# Altium PCB Печатная плата.PcbDoc
Units mm, origin at the board's own origin, x right, y up, seen from the top; angles counter-clockwise.
Board outline 140 x 100 mm, 2 copper layers (Top Layer, Bottom Layer), stack 1.571 mm thick; 55 components, 41 nets, 204 pads, 18 vias.
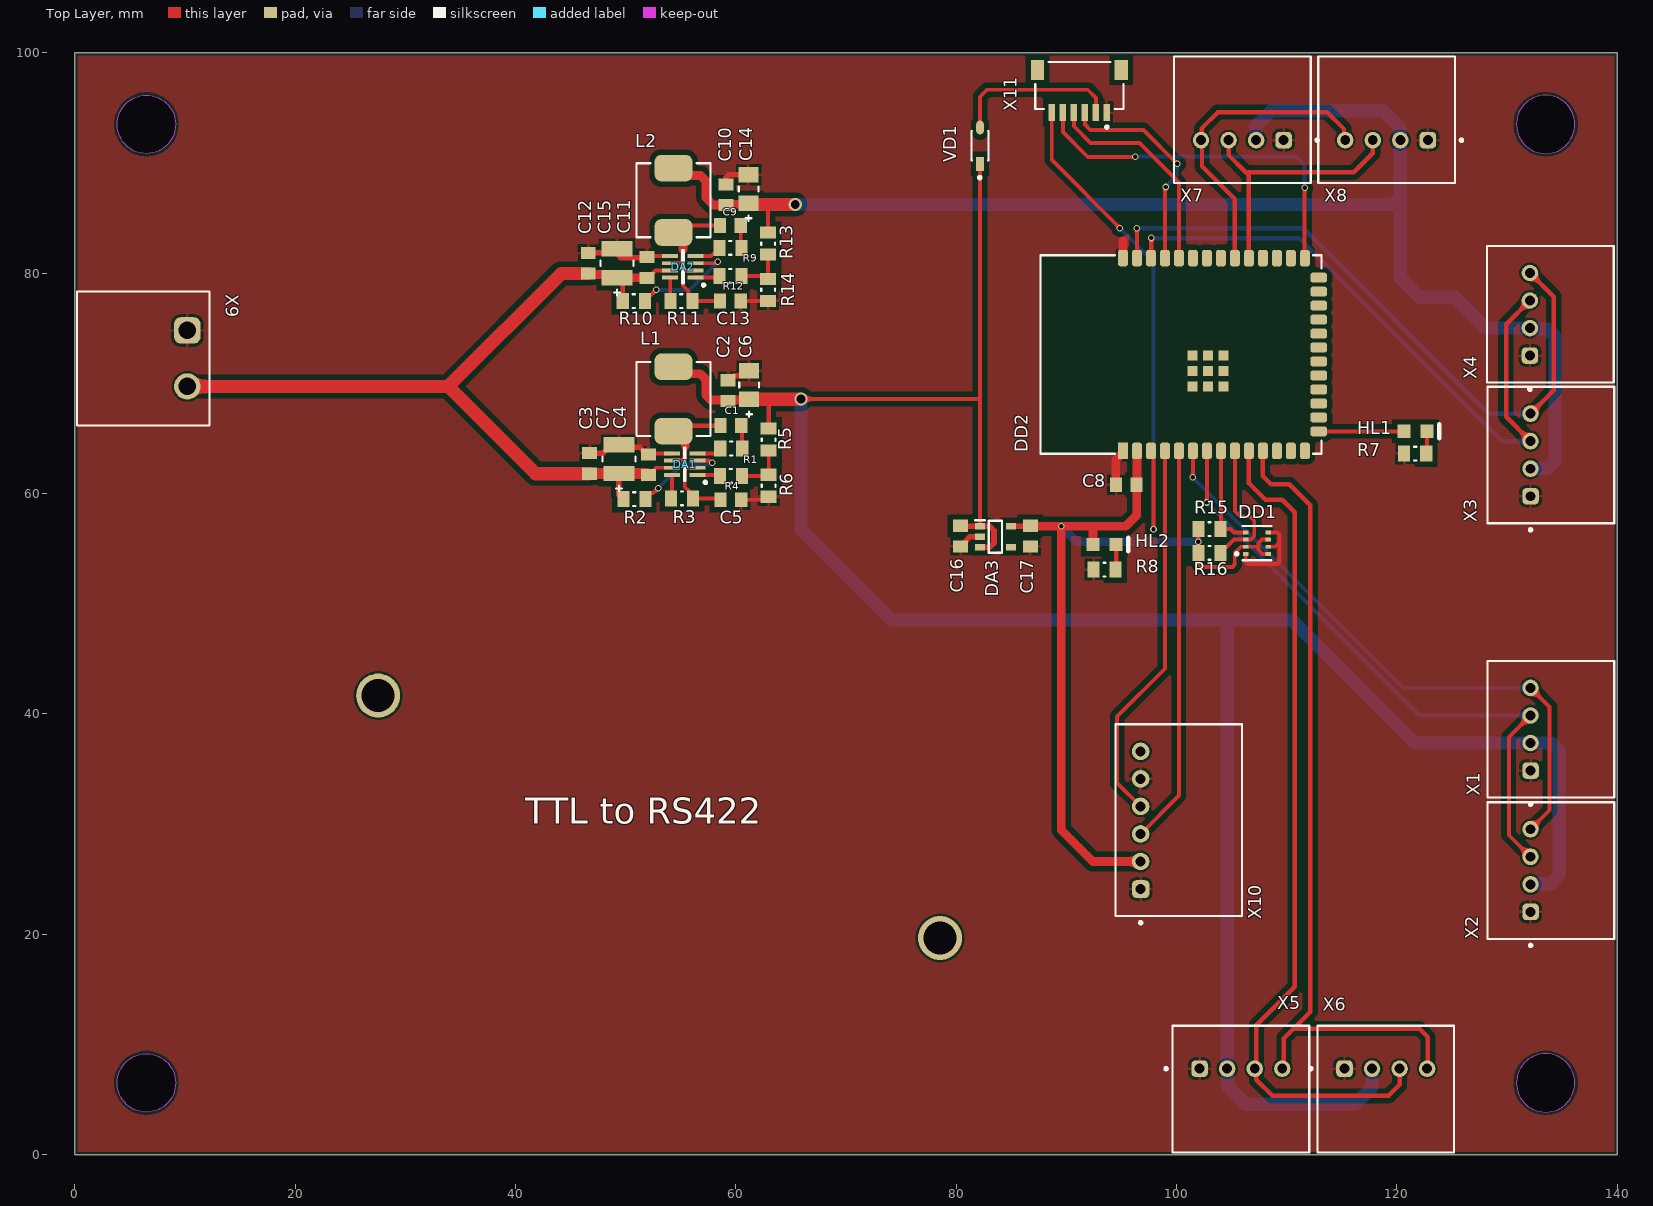
[diagram p0: Top Layer view]
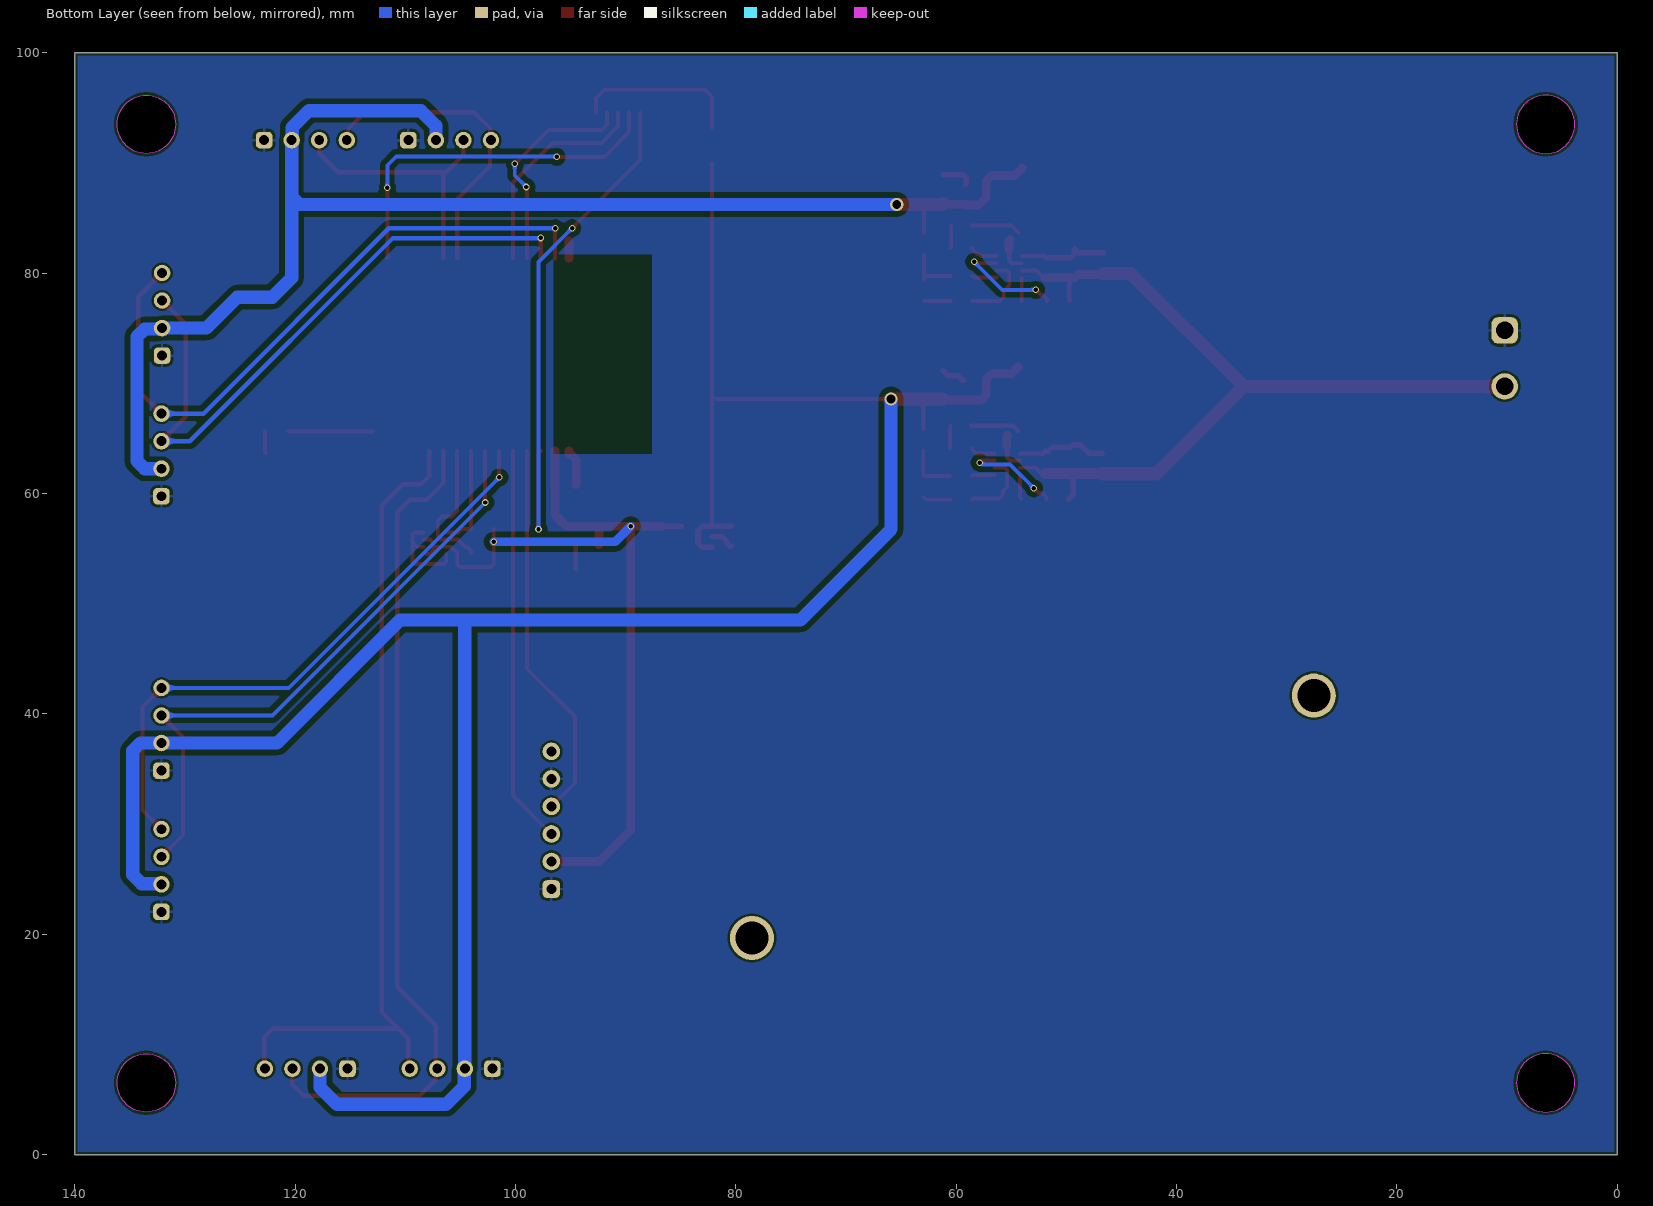
[diagram p1: Bottom Layer view, seen from below]
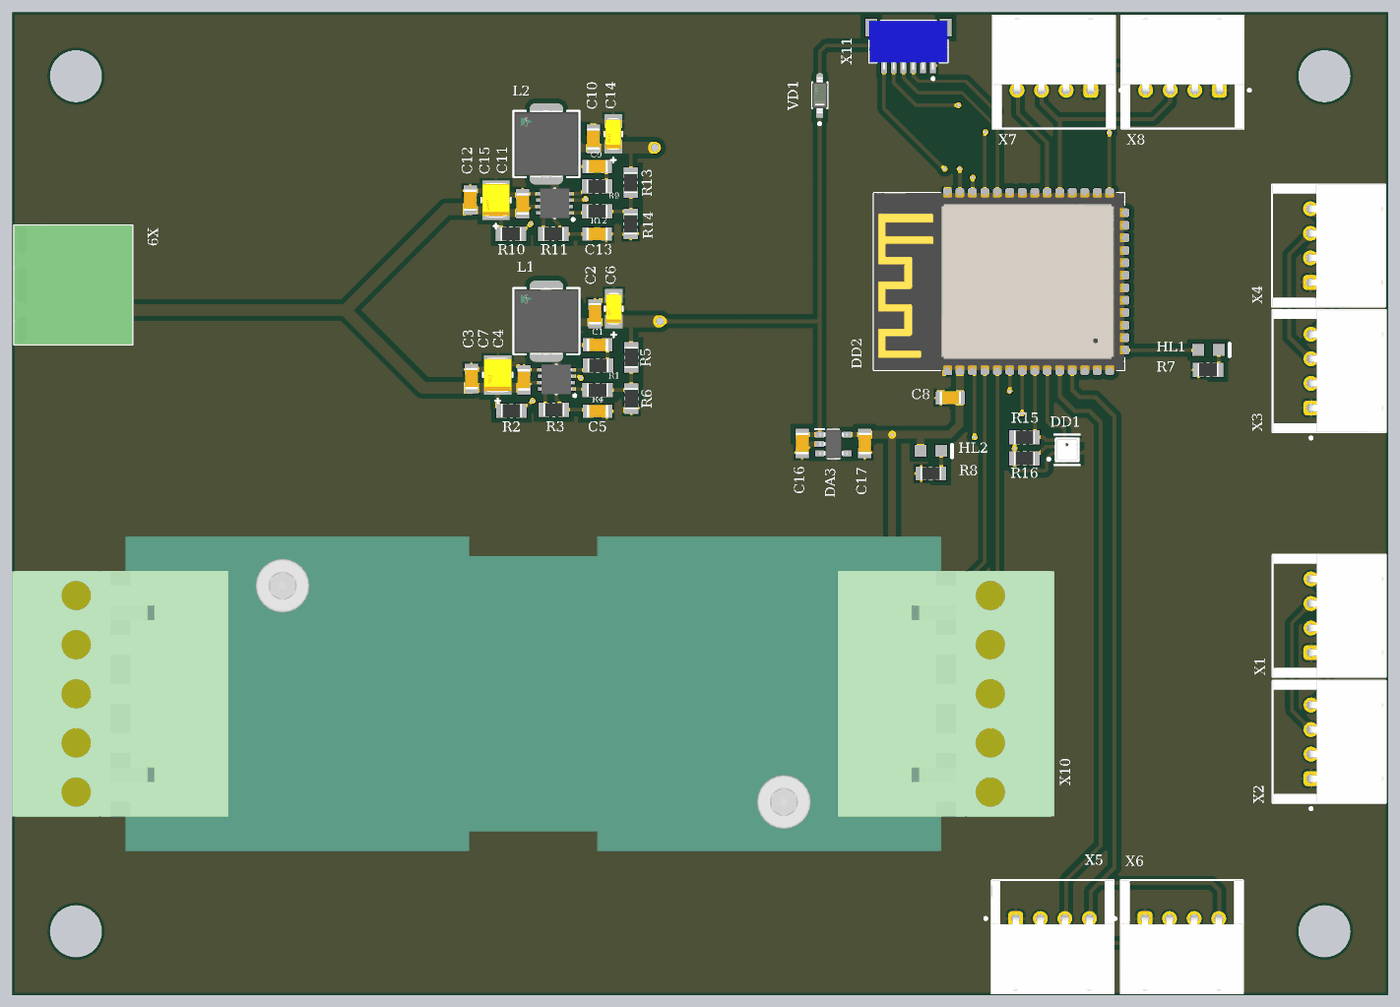
[diagram p2: 3D render of the assembled board from above, using the file's embedded part models]

## Layer stack, top to bottom
Top Solder: solder mask 0.0102, SunChemicalXV501-T LDI, Dk 3.5
Top Layer: signal copper 0.0356
Dielectric 1: dielectric 1.5, FR-4, Dk 4.8
Bottom Layer: signal copper 0.0356
Bottom Solder: solder mask 0.0102, SunChemicalXV501-T LDI, Dk 3.5

## Board outline
0.006,0.006 0.006,100.006 140.006,100.006 140.006,0.006
cut-out: 130.856,93.506 ccw(c133.506,93.506) 133.506,90.856 ccw(c133.506,93.506) 136.156,93.506 ccw(c133.506,93.506) 133.506,96.156 ccw(c133.506,93.506)
cut-out: 130.856,6.506 ccw(c133.506,6.506) 133.506,3.856 ccw(c133.506,6.506) 136.156,6.506 ccw(c133.506,6.506) 133.506,9.156 ccw(c133.506,6.506)
cut-out: 6.506,90.856 cw(c6.506,93.506) 3.856,93.506 cw(c6.506,93.506) 6.506,96.156 cw(c6.506,93.506) 9.156,93.506 cw(c6.506,93.506)
cut-out: 6.506,3.856 cw(c6.506,6.506) 3.856,6.506 cw(c6.506,6.506) 6.506,9.156 cw(c6.506,6.506) 9.156,6.506 cw(c6.506,6.506)

## Design rules (kind name [scope] priority, off if disabled: settings)
BoardOutlineClearance [All] p1: gap=0.25 ignorepadtopadclearanceinfootprint=FALSE
Clearance [All] p1: gap=0.2 ignorepadtopadclearanceinfootprint=FALSE except(0.5: Arc-Fill Arc-Poly Arc-Region Track-Fill Track-Poly Track-Region SMDPad-Fill SMDPad-Poly SMDPad-Region Via-Fill Via-Poly Via-Region)
ComponentClearance [All] p1: gap=0 collisioncheckmode=3 verticalgap=0 showdistances=FALSE
HoleSize [All] p1: absolutevalues=TRUE maxlimit=3 minlimit=0.025 maxpercent=80.000 minpercent=20.000
MinimumSolderMaskSliver [All] p1: minsoldermaskwidth=0.2
PolygonConnect [All] p1: connectstyle=Relief reliefconductorwidth=0.254 reliefentries=4 polygonreliefangle="90 Angle" airgapwidth=0.254
RoutingVias [All] p1: holewidth=0.8 width=1.2 viastyle="Through Hole" minholewidth=0.3 minwidth=0.5 maxholewidth=0.4 maxwidth=0.6
SilkToSilkClearance [All] p1: silktosilkclearance=0.2
SolderMaskExpansion [All] p1: expansion=0.102 istentingtop=FALSE
SupplyNets "Schematic Supply Nets_4" [InNet('+3.3')] p1: voltage=0.000
SupplyNets "Schematic Supply Nets_3" [InNet('GND')] p2: voltage=0.000
SupplyNets "Schematic Supply Nets_2" [InNet('VIN')] p3: voltage=0.000
SupplyNets "Schematic Supply Nets_1" [InNet('+5 гр1')] p4: voltage=0.000
SupplyNets "Schematic Supply Nets" [InNet('+5 гр2')] p5: voltage=0.000
Width [All] p1: maxlimit=1.2 minlimit=0.2 preferedwidth=0.4
26 further rules are at their usual default settings.

## Components (designator, comment, footprint, x,y, rotation, side; value= is the part's Value field where it differs from the comment)
C1 "100nF" CAPC2012X10N 59.563,66.167 r0 top
C2 "100nF" CAPC2012X10N 59.309,69.342 r90 top
C3 "100nF" CAPC2012X10N 46.736,62.738 r90 top
C4 "100nF" CAPC2012X10N 52.07,62.611 r90 top
C5 "100nF" CAPC2012X10N 59.563,59.436 r0 top
C6 "47uF" FP-TAJA-MFG 61.214,69.85 r270 top
C7 "10uF" FP-TAJB-MFG 49.403,63.119 r270 top
C8 "100nF" CAPC2012X10N 95.449,60.795 r180 top
C9 "100nF" CAPC2012X10N 59.512,84.328 r0 top
C10 "100nF" CAPC2012X10N 59.131,87.122 r90 top
C11 "100nF" CAPC2012X10N 51.943,80.518 r90 top
C12 "100nF" CAPC2012X10N 46.609,80.899 r90 top
C13 "100nF" CAPC2012X10N 59.512,77.47 r0 top
C14 "47uF" FP-TAJA-MFG 61.163,87.63 r270 top
C15 "10uF" FP-TAJB-MFG 49.225,80.899 r270 top
C16 "10uF" CAPC2012X10N 80.391,56.134 r270 top
C17 "10uF" CAPC2012X10N 86.741,56.134 r270 top
DA1 "MP9943GQ-Z" "MP9943 QFN8" 57.115,61.017 r180 top
DA2 "MP9943GQ-Z" "MP9943 QFN8" 56.951,78.924 r180 top
DA3 "LM8805SF5-3.3" SOT95P280X130-5N 83.566,56.083 r0 top
DD1 "BME280" FP-BME280-MFG 107.315,55.499 r180 top
DD2 "ESP32-S3-WROOM-1" ESP32-S3-WROOM-1 100.407,72.617 r90 top
HL1 "FYLS-0805URC" "LED 0805" 121.7,65.659 r0 top
HL2 "FYLS-0805URC" "LED 0805" 93.472,55.372 r0 top
L1 "10uH" FP-IHLP-2525CZ-FP_2_413x3-MFG 54.356,68.58 r90 top
L2 "10uH" FP-IHLP-2525CZ-FP_2_413x3-MFG 54.356,86.614 r90 top
R1 "20" RES0805 59.595,64.084 r0 top
R2 "510k" RES0805 50.8,59.484 r0 top
R3 "100k" RES0805 55.118,59.563 r180 top
R4 "51k" RES0805 59.563,61.595 r0 top
R5 "41.2k" RES0805 62.992,64.897 r90 top
R6 "7.5k" RES0805 62.992,60.706 r90 top
R7 "56" RES0805 121.666,63.627 r0 top
R8 "56" RES0805 93.472,53.086 r0 top
R9 "20" RES0805 59.512,82.296 r0 top
R10 "510k" RES0805 50.749,77.47 r0 top
R11 "100k" RES0805 55.067,77.47 r180 top
R12 "51k" RES0805 59.512,79.756 r0 top
R13 "41.2k" RES0805 62.941,82.677 r90 top
R14 "7.5k" RES0805 62.941,78.486 r90 top
R15 "4.7k" RES0805 102.997,56.769 r180 top
R16 "4.7k" RES0805 102.997,54.61 r180 top
"TTL to RS422" "Comment" WaveShareTTLto422 27.545,19.66 r0 top
VD1 "B0520W" FP-SOD123-IPC_B 82.169,91.567 r90 top
X1 "S4B-XH-A(LF)(SN)" FP-S4B-XH-A-1_LF_SN-MFG 133.985,38.608 r270 top
X2 "S4B-XH-A(LF)(SN)" FP-S4B-XH-A-1_LF_SN-MFG 133.985,25.781 r270 top
X3 "S4B-XH-A(LF)(SN)" FP-S4B-XH-A-1_LF_SN-MFG 133.985,63.5 r270 top
X4 "S4B-XH-A(LF)(SN)" FP-S4B-XH-A-1_LF_SN-MFG 133.93,76.267 r270 top
X5 "S4B-XH-A(LF)(SN)" FP-S4B-XH-A-1_LF_SN-MFG 105.851,5.95 r180 top
X6 "S4B-XH-A(LF)(SN)" FP-S4B-XH-A-1_LF_SN-MFG 119,5.95 r180 top
X7 "S4B-XH-A(LF)(SN)" FP-S4B-XH-A-1_LF_SN-MFG 105.978,93.925 r0 top
X8 "S4B-XH-A(LF)(SN)" FP-S4B-XH-A-1_LF_SN-MFG 119.066,93.925 r0 top
X9 "2EDGRC-5.08-02P-14" 691313510002 6.225,72.263 r270 top
X10 "S6B-XH-A" FP-S6B-XH-A_LF_SN-MFG 100.203,30.353 r270 top
X11 "SM06B-SRSS-TB" JST-SM06B-SRSS-TB_V 91.186,97.028 r180 top

## Footprints (in the part's own frame and the unit in brackets; to place one, negate y for a bottom-side part, rotate by r counter-clockwise, add the part's x,y. Pads: shape width x height; smd on the part's side, far side on the other; paste and mask are expansions set on the pad)
691313510002 [mm] "5,08mm - PCB Headers - Horizontal - Closed ends - 02p"
  rrect50% 2.4x2.4 hole 1.6: 1(-2.54,4)
  round 2.4 hole 1.6: 2(2.54,4)
  silkscreen extent -6.08,-6 6.08,6, body extent -6.08,-6 6.08,6, height 8.55
CAPC2012X10N [mm] "Chip Capacitor, 2-Leads, Body 2,05x1,20mm, IPC Medium Density"
  rect 1.1x1.35 smd: 1(-0.94,0) 2(0.94,0)
  body extent -1.1,-0.65 1.1,0.65, height 1
ESP32-S3-WROOM-1 [mm] "PCB ANTENNA - 41 PIN"
  rect 1.5x0.9 smd: 1(-8.75,5.26)
  rrect50% 1.5x0.9 smd: 2(-8.75,3.99) 3(-8.75,2.72) 4(-8.75,1.45) 5(-8.75,0.18) 6(-8.75,-1.09) 7(-8.75,-2.36) 8(-8.75,-3.63) 9(-8.75,-4.9) 10(-8.75,-6.17) 11(-8.75,-7.44) 12(-8.75,-8.71) 13(-8.75,-9.98) 14(-8.75,-11.25) 27(8.75,-11.25) 28(8.75,-9.98) 29(8.75,-8.71) 30(8.75,-7.44) 31(8.75,-6.17) 32(8.75,-4.9) 33(8.75,-3.63) 34(8.75,-2.36) 35(8.75,-1.09) 36(8.75,0.18) 37(8.75,1.45) 38(8.75,2.72) 39(8.75,3.99) 40(8.75,5.26)
  rrect50% 0.9x1.5 smd: 15(-6.985,-12.5) 16(-5.715,-12.5) 17(-4.445,-12.5) 18(-3.175,-12.5) 19(-1.905,-12.5) 20(-0.635,-12.5) 21(0.635,-12.5) 22(1.905,-12.5) 23(3.175,-12.5) 24(4.445,-12.5) 25(5.715,-12.5) 26(6.985,-12.5)
  rect 0.9x0.9 smd: 41(-2.9,-2.46) 41(-2.9,-1.06) 41(-2.9,-3.86) 41(-1.5,-1.06) 41(-1.5,-3.86) 41(-1.5,-2.46) 41(-0.1,-1.06) 41(-0.1,-2.46) 41(-0.1,-3.86)
  silkscreen extent -9,-12.75 9,12.75, body extent -9,-12.75 9,12.75, height 3.1
FP-BME280-MFG [mm]
  rect 0.5x0.35 smd paste+0 mask+0: 1(1.025,0.975) 2(1.025,0.325) 3(1.025,-0.325) 4(1.025,-0.975) 5(-1.025,-0.975) 6(-1.025,-0.325) 7(-1.025,0.325) 8(-1.025,0.975)
  silkscreen extent -1.3,-1.55 1.97,1.55, body extent -1.25,-1.25 1.25,1.25, height 0.97
FP-IHLP-2525CZ-FP_2_413x3-MFG [mil]
  rrect50% 95x135 smd paste+0 mask+0: 1(-115,0) 2(115,0)
  silkscreen extent -132,-132 132,132, body extent -166,-136 166,136, height 10
FP-S4B-XH-A-1_LF_SN-MFG [mm]
  rrect50% 1.5x1.5 hole 0.9 paste-2539.97 mask+0: 1(3.75,-1.85)
  round 1.5 hole 0.9 paste-2539.97 mask+0: 2(1.25,-1.85) 3(-1.25,-1.85) 4(-3.75,-1.85)
  silkscreen extent -6.2,-5.75 6.92,5.75, body extent -6.3,-5.85 6.3,5.85, height 0.25
FP-S6B-XH-A_LF_SN-MFG [mm]
  rrect50% 1.6x1.6 hole 0.9 paste-2539.97 mask+0: 1(6.25,-3.45)
  round 1.6 hole 0.9 paste-2539.97 mask+0: 2(3.75,-3.45) 3(1.25,-3.45) 4(-1.25,-3.45) 5(-3.75,-3.45) 6(-6.25,-3.45)
  silkscreen extent -8.7,-5.75 9.42,5.75, body extent -8.8,-5.85 8.8,5.85, height 0.25
FP-SOD123-IPC_B [mm]
  rect 1.257x0.702 smd paste+0 mask+0: 1(-1.65,0)
  rrect100% 1.257x0.702 smd paste+0 mask+0: 2(1.65,0)
  silkscreen extent -3.02,-0.77 1.33,0.77, body extent -2.53,-1.02 2.53,1.02, height 0.25
FP-TAJA-MFG [mm]
  rect 1.4x1.8 smd paste+0 mask+0: 1(-1.3,0) 2(1.3,0)
  silkscreen extent -0.23,-0.9 2.9,0.9, body extent -2.1,-1 2.1,1, height 0.25
FP-TAJB-MFG [mm]
  rect 1.4x2.8 smd paste+0 mask+0: 1(-1.3,0) 2(1.3,0)
  silkscreen extent -0.23,-1.5 2.9,1.5, body extent -2.1,-1.6 2.1,1.6, height 0.25
JST-SM06B-SRSS-TB_V [mm] "SMD, 6-Leads, Body 8x4.25mm, Pitch 1mm"
  rect 0.6x1.55 smd: 1(-2.5,2.45) 2(-1.5,2.45) 3(-0.5,2.45) 4(0.5,2.45) 5(1.5,2.45) 6(2.5,2.45)
  rect 1.2x1.8 smd: MP1(-3.8,-1.425) MP2(3.8,-1.425)
  silkscreen extent -4,-2.12 4,3.9, body extent -4,-2.12 4,2.83, height 2.96
"LED 0805" [mm] "SMD, 2-Leads, Body 2x1.25mm, Height 0.8mm"
  rect 1.2x1.2 smd: 1(-1.05,0) 2(1.05,0)
  silkscreen extent 2.15,-0.63 2.15,0.63, body extent -1,-0.63 1,0.63, height 0.8
"MP9943 QFN8" [mm]
  rect 1.45x0.35 smd: 1(0.6,-0.675) 2(0.6,-1.325) 3(0.6,-1.975) 4(0.6,-2.625) 5(2.9,-2.625) 6(2.9,-1.975) 7(2.9,-1.325) 8(2.9,-0.675)
  silkscreen extent -0.25,-3.15 1.83,0.12, body extent 0.2,-3.15 3.3,-0.15, height 1
RES0805 [mm] "Chip Resistor, 2-Leads, Body 2.1x1.35mm, IPC Low Density"
  rect 1.1x1.45 smd: 1(-1,0) 2(1,0)
  silkscreen extent -0.1,-0.63 0.1,0.63, body extent -1.05,-0.68 1.05,0.67, height 0.6
SOT95P280X130-5N [mm]
  rect 0.9x0.6 smd: 1(-1.4,0.95) 2(-1.4,0) 3(-1.4,-0.95) 4(1.4,-0.95) 5(1.4,0.95)
  silkscreen extent -1.85,-1.45 0.6,1.5, body extent -1.4,-1.45 1.4,1.45, height 1.3
WaveShareTTLto422 [mm]
  round 4 hole 3 paste-2539.97 mask+0: MH9(0,22) MH9(51,0)
  body extent -27.53,-4.99 78.47,27.01, height 22.5

## Part data
C1 C2 C3 C4 C5 C8 C9 C11 C12 C13: library part "Конденсатор керамика"
  C1 C2 C3 C4 C5: ClassName=DCDC1
  C9 C11 C12 C13: ClassName=DCDC2
C6 C7 C14 C15: library part "Конденсатор танталовый", "Capacitor Polarised", Arrow Part Number=293D475X9010A2TE3, Manufacturer_Name=Vishay, Mouser Part Number=74-293D475X9010A2TE3, Arrow Price/Stock=https://www.arrow.com/en/products/293d475x9010a2te3/vishay, Datasheet Link=http://www.vishay.com/docs/40002/293d.pdf, Height=1.8mm, Manufacturer_Part_Number=293D475X9010A2TE3, Mouser Price/Stock=https://www.mouser.co.uk/ProductDetail/Vishay-Sprague/293D475X9010A2TE3?qs=zj6zwI%252Bv92RDYyeabgx%252B6w%3D%3D
  C6 C7: ClassName=DCDC1
  C14 C15: ClassName=DCDC2
C10: library part "Конденсатор керамика", Manufacturer=Murata, ClassName=DCDC2
C16 C17: library part "Capasitor SMD", ClassName=Power
DA1 DA2: "High Efficiency 3A Peak, 36V, / Synchronous Step Down Converter / With Power Good"
  DA1: ClassName=DCDC1
  DA2: ClassName=DCDC2
DA3: library part XC6219B332MRN, "Voltage stabilizer 3.3v 350mA", Manufacturer_Name=Torex, ClassName=Power, Datasheet Link=https://componentsearchengine.com/Datasheets/2/XC6219B332MRN.pdf, Height=1.3mm, Manufacturer_Part_Number=XC6219B332MRN
DD1: "SENSOR PRESSURE HUMIDITY TEMP", Case/Package=LGA, Max Operating Temperature=85°C, Min Operating Temperature=-40°C, Accuracy=3%, Lead Free="Lead Free", Mount="Surface Mount", Number of Pins=8, Output Type=SPI, Packaging="Cut Tape", Response Time=1s, Sensor Type=Temperature
DD2: "RX TXRX MOD WIFI SURFACE MOUNT", Case/Package=SMD/SMT, Frequency=2.5GHz, Max Operating Temperature=85°C, Min Operating Temperature=-40°C, Operating Supply Voltage=3.6V, Package Quantity=550, Data Rate=150Mbps, Mount="Surface Mount", Packaging="Cut Tape", Sensitivity=-98dBm, Weight=0.088185oz
HL1: library part Светодиод, Manufacturer="Ningbo Foryard Optoelectronics", ClassName=Indacation
HL2: library part Светодиод
L1 L2: library part Дроссель, Ambient Temperature Range High=95°C, Ambient Temperature Range Low=-40°C, Case Code (Imperial)=1919, Case Code (Metric)=4848, Current Rating=420mA, DC Resistance (DCR)=770mΩ, Inductance=150µH, Inductance Tolerance=30%, Max Operating Temperature=125°C, Saturation Current=220mA, Self Resonant Frequency=7MHz, Test Frequency=100kHz, Case/Package=1919, Composition=Wirewound, Core Material=Ferrite, Height=2.8mm, Height - Seated (Max)=2.9972mm, Length=4.8mm, Max DC Current=420mA, Min Operating Temperature=-40°C, Mount="Surface Mount", NexarPartId=22866852, Number of Pins=2, Packaging="Tape & Reel (TR)", REACH SVHC=Unknown, RMS Current (Irms)=420mA, RoHS=Compliant, Shielding=Shielded, Termination=SMD/SMT, Tolerance=30%, Width=4.8mm
  L1: ClassName=DCDC1
  L2: ClassName=DCDC2
R1 R2 R3 R4 R5 R6 R7 R8 R9 R10 R11 R12 R13 R14 R15 R16: library part "Резистор SMD", "SMD resistors with differents footprints"
  R1 R2 R3 R4 R5 R6: ClassName=DCDC1
  R7: ClassName=Indacation
  R9 R10 R11 R12 R13 R14: ClassName=DCDC2
VD1: library part "Диод Шоттки"
X1 X2 X3 X4 X5 X6 X7 X8: library part JST-4P, "JST type connector", Net1=GND, Net2=+5V, Net3=A, Net4=B
X9: library part "Screw terminal 2p", "XT30-PWM", Net1=GND, Net2=+5V
X10 X11: library part JST-6P, "JST type connector", Net1=GND, Net2=+5V
  X10: Net3=RX, Net4=TX, Net5="GND TTL", Net6=NC
  X11: Net3=TX, Net4=RX, Net5=BOOT, Net6=ENABLE

## Via types
v1: diameter 0.6, hole 0.4, Top Layer to Bottom Layer, 16 vias
v2: diameter 1.2, hole 0.8, Top Layer to Bottom Layer, 2 vias

## Nets (pads, with @x,y where several pads share a name; then routed paths per layer and width w, separated by ;. In a path a pad name is that pad's centre, name@x,y a point inside that pad or via, vN(x,y) a via of type N, cw(c..) or ccw(c..) an arc to the next point about the centre after c; other vN are vias at no path point)
+3.3: C8.1 C17.1 DA3.5 DD1.2 DD1.6 DD1.8 DD2.2 HL2.1 R15.2 R16.2 X10.2 | length 81
  Top Layer w0.35: R15.2 101.981,56.753 v1(101.981,55.626) 101.981,53.594 102.235,53.34 105.078,53.34 105.283,53.545 105.283,54.61 105.847,55.174 DD1.2 107.434,55.174 107.442,55.181 ; 108.077,54.508 108.061,54.524 107.782,54.524 107.442,54.864 107.442,55.181 ; DD1.6 107.767,55.824 107.442,55.499 107.442,55.181
  Top Layer w0.5: DA3.5 86.7,57.033 C17.1
  Top Layer w0.8: C17.1@86.741,57.033 v1(89.535,57.033) ; HL2.1 92.422,56.94 92.329,57.033 ; DD2.2 96.417,60.824 C8.1 96.389,58.035 95.387,57.033 92.329,57.033 ; X10.2 92.396,26.603 89.535,29.464 v1(89.535,57.033) ; v1(89.535,57.033) 92.329,57.033
  Bottom Layer w0.8: v1(89.535,57.033) 90.942,55.626 v1(101.981,55.626)
"+5 гр1": C2.1 C6.2 C16.1 DA3.1 DA3.3 L1.2 R5.2 VD1.1 X1.2 X2.2 X5.2 X6.2 | length 232.9
  Top Layer w0.4: R5.2 62.992,68.438 63.104,68.55 ; v2(65.913,68.58) 82.166,68.58 ; DA3.1 82.166,68.58 ; VD1.1 82.169,84.68 82.166,84.677 82.166,68.58
  Top Layer w0.5: C16.1 80.442,57.023 83.058,57.023 83.439,56.642 83.439,55.499 83.073,55.133 DA3.3
  Top Layer w0.8: L1.2 54.991,70.866 56.769,70.866 57.277,70.358 57.277,68.945 57.746,68.476 61.14,68.476 C6.2
  Top Layer w1.2: C6.2 63.104,68.55 65.883,68.55 v2(65.913,68.58)
  Bottom Layer w1.2: v2(65.913,68.58) 65.913,56.769 74.168,48.514 104.601,48.514 ; X6.2 117.75,6.117 116.205,4.572 106.299,4.572 104.658,6.213 104.658,7.69 104.601,7.747 104.601,48.514 ; X2.2 132.192,24.588 133.935,24.588 134.747,25.4 134.747,36.655 134.044,37.358 X1.2 121.646,37.358 110.49,48.514 104.601,48.514
"+5 гр2": C10.1 C14.2 L2.2 R13.2 X3.2 X4.2 X7.2 X8.2 | length 130.5
  Top Layer w0.35: 62.865,86.233 62.941,86.157 R13.2
  Top Layer w0.8: L2.2@54.023,89.535 54.704,88.854 56.808,88.854 57.277,88.385 57.277,86.868 57.963,86.182 C10.1 59.205,86.256 61.089,86.256 C14.2
  Top Layer w1.2: C14.2 61.26,86.233 62.865,86.233 v2(65.405,86.233)
  Bottom Layer w1.2: v2(65.405,86.233) 119.613,86.233 120.316,86.936 ; X7.2 107.228,93.385 108.585,94.742 118.745,94.742 120.261,93.226 120.261,92.13 X8.2 120.316,86.936 ; X4.2 128.056,75.017 125.252,77.821 122.077,77.821 120.316,79.582 120.316,86.936 ; X3.2 133.663,62.25 134.366,62.953 134.366,74.227 133.663,74.93 X4.2@132.379,74.93
"A1 гр1": DD2.7 X1.3 X2.3 | length 56.5
  Top Layer w0.35: v1(102.743,59.182) 102.767,59.206 DD2.7 ; X2.3 130.175,28.991 130.175,37.898 X1.3
  Bottom Layer w0.35: v1(102.743,59.182) 122.067,39.858 X1.3
"A1 гр2": DD2.38 X3.3 X4.3 | length 58.5
  Top Layer w0.4: DD2.38 97.727,81.407 v1(97.727,83.196) ; X4.3 129.921,75.358 129.921,66.964 X3.3
  Bottom Layer w0.4: v1(97.727,83.196) 97.738,83.185 111.125,83.185 129.56,64.75 X3.3
"A2 гр1": DD2.10 X5.3 X6.3 | length 76.7
  Top Layer w0.4: DD2.10 106.577,60.936 108.077,59.436 109.601,59.436 110.744,58.293 110.744,15.24 107.25,11.746 107.25,7.946 107.25,7.896 107.101,7.747 107.25,7.598 107.25,6.796 108.712,5.334 119.253,5.334 120.25,6.331 X6.3
"A2 гр2": DD2.31 X7.3 X8.3 | length 24.9
  Top Layer w0.4: X7.3 104.728,90.725 106.299,89.154 ; DD2.31 106.577,88.876 106.299,89.154 ; X8.3 117.816,90.892 116.078,89.154 106.299,89.154
"B1 гр1": DD2.6 X1.4 X2.4 | length 55.2
  Top Layer w0.35: v1(101.473,61.468) 101.497,61.492 DD2.6 ; X2.4 133.858,31.254 133.858,40.635 X1.4
  Bottom Layer w0.35: v1(101.473,61.468) 120.583,42.358 X1.4
"B1 гр2": DD2.39 X3.4 X4.4 | length 60
  Top Layer w0.4: v1(96.393,84.074) 96.417,84.05 DD2.39 ; X4.4 134.239,77.858 134.239,69.354 X3.4
  Bottom Layer w0.4: v1(96.393,84.074) 111.506,84.074 128.33,67.25 X3.4
"B2 гр1": DD2.11 X5.4 X6.4 | length 75.3
  Top Layer w0.4: DD2.11 107.823,63.843 107.823,61.595 108.585,60.833 110.236,60.833 112.141,58.928 112.141,12.954 110.617,11.43 ; X5.4@109.601,7.747 109.75,7.896 109.75,10.563 110.617,11.43 ; X6.4 122.809,7.859 122.809,10.668 122.047,11.43 110.617,11.43
"B2 гр2": DD2.32 X7.4 X8.4 | length 28.3
  Top Layer w0.4: DD2.32 105.307,86.717 102.316,89.708 102.316,91.987 X7.4 102.278,92.125 102.278,93.134 103.759,94.615 113.665,94.615 115.206,93.074 115.206,92.185 X8.4
BOOT: DD2.27 X11.5 | length 33.4
  Top Layer w0.35: X11.5 89.686,92.813 91.948,90.551 v1(96.266,90.551) ; v1(111.633,87.757) 111.633,81.391 DD2.27
  Bottom Layer w0.35: v1(96.266,90.551) 96.306,90.591 110.831,90.591 111.633,89.789 v1(111.633,87.757)
EN: DD2.3 X11.6 | length 48.8
  Top Layer w0.35: X11.6 88.686,90.257 v1(94.869,84.074) ; DD2.3 97.917,63.637 v1(97.917,56.769)
  Bottom Layer w0.35: v1(94.869,84.074) 97.917,81.026 v1(97.917,56.769)
GND: C2.2 C3.2 C4.2 C5.2 C6.1 C7.1 C8.2 C10.2 C11.2 C12.2 C13.2 C14.1 C15.1 C16.2 C17.2 DA1.5 DA2.5 DA3.2 DD1.1 DD1.5 DD1.7 DD2.1 DD2.40 R6.1 R7.1 R8.1 R14.1 X1.1 X2.1 X3.1 X4.1 X5.1 X6.1 X7.1 X8.1 X9.1 X10.1 X10.5 X11.1 | length 42.4
  Top Layer w0.35: C11.2@52.034,81.549 DA2.5 ; C4.2@52.161,63.642 DA1.5 ; C13.2 62.83,77.47 62.846,77.486 R14.1 ; C5.2 62.722,59.436 R6.1 ; DD1.1 106.29,53.799 106.495,53.594 109.142,53.594 109.347,53.799 109.347,55.577 ; DD1.7 108.944,55.174 109.347,55.577 ; DD1.5 109.142,56.474 109.347,56.269 109.347,55.577
  Top Layer w0.5: C12.2 48.865,81.839 C15.1 49.276,82.148 49.276,81.7 49.569,81.407 51.892,81.407 C11.2 C11.2@52.034,81.549 ; C3.2 47.962,63.678 48.703,64.419 C7.1 49.609,64.213 51.26,64.213 51.623,63.851 51.952,63.851 C4.2@52.161,63.642 ; C10.2 59.072,88.121 59.072,88.637 59.364,88.93 C14.1 ; C2.2 59.434,70.282 59.852,70.7 60.764,70.7 C6.1 ; C16.2 80.516,55.194 80.816,55.494 80.816,55.619 81.28,56.083 DA3.2
  Top Layer w0.8: C8.2 94.488,60.816 94.488,63.048 94.957,63.517 95.097,63.517 95.147,63.567 DD2.1 ; 95.123,82.931 95.147,82.907 DD2.40
LED: DD2.15 HL1.1 | length 7.8
  Top Layer w0.35: DD2.15 120.623,65.632 HL1.1
NetC1_1: C1.1 DA1.6 L1.1 | length 8.8
  Top Layer w0.35: DA1.6 55.088,62.992
  Top Layer w0.4: L1.1 54.864,66.167 C1.1 ; 55.088,62.992 55.36,63.264 L1.1@55.36,65.278
  Top Layer w0.8: L1.1@55.36,65.278 55.41,65.228 55.41,64.286
NetC1_2: C1.2 R1.2 | length 2.1
  Top Layer w0.35: C1.2 60.563,66.107 60.563,64.116 R1.2
NetC5_1: C5.1 DA1.2 R3.1 | length 6.7
  Top Layer w0.35: DA1.2 55.577,62.342 55.372,62.137 55.372,60.609 55.743,60.238 55.743,59.938 R3.1 58.496,59.563 C5.1
NetC9_1: C9.1 DA2.6 L2.1 | length 7.6
  Top Layer w0.35: DA2.6 54.94,80.899 ; L2.1 54.991,84.328 C9.1
  Top Layer w0.4: 54.94,80.899 55.201,81.16 55.201,82.148
  Top Layer w0.8: L2.1@55.151,83.044 55.201,82.994 55.201,82.148
NetC9_2: C9.2 R9.2 | length 2.1
  Top Layer w0.35: C9.2 60.452,82.356 R9.2
NetC13_1: C13.1 DA2.2 R11.1 | length 6.7
  Top Layer w0.35: DA2.2 55.399,80.249 55.194,80.044 55.194,78.867 55.692,78.369 55.692,77.845 R11.1 C13.1
NetDA1_1: DA1.1 R4.1 | length 2.1
  Top Layer w0.35: DA1.1 58.466,61.692 R4.1
NetDA1_3: DA1.3 R2.2 | length 9
  Top Layer w0.35: R2.2 51.8,59.659 52.175,60.034 52.511,60.034 v1(52.959,60.482) ; DA1.3 57.6,62.992 57.795,62.797 v1(57.863,62.797)
  Bottom Layer w0.35: v1(52.959,60.482) 55.118,62.641 57.639,62.641 57.795,62.797 v1(57.863,62.797)
NetDA1_4: DA1.4 R1.1 | length 2.3
  Top Layer w0.35: DA1.4 58.22,63.642 58.595,64.017 R1.1
NetDA1_8: DA1.8 R3.2 | length 2.2
  Top Layer w0.35: R3.2 54.215,59.66 DA1.8
NetDA2_1: DA2.1 R12.1 | length 2.2
  Top Layer w0.35: DA2.1 58.355,79.599 R12.1
NetDA2_3: DA2.3 R10.2 | length 10.3
  Top Layer w0.35: R10.2 51.749,77.645 52.124,78.02 52.299,78.02 52.765,78.486 v1(52.781,78.486) ; DA2.3 58.175,80.899 58.302,81.026 v1(58.369,81.026)
  Bottom Layer w0.35: v1(52.781,78.486) 55.829,78.486 v1(58.369,81.026)
NetDA2_4: DA2.4 R9.1 | length 2.6
  Top Layer w0.35: DA2.4 57.765,81.549 57.962,81.746 58.137,81.746 58.512,82.121 R9.1
NetDA2_8: DA2.8 R11.2 | length 2.1
  Top Layer w0.35: DA2.8 54.051,77.486 R11.2
NetHL1_2: HL1.2 R7.2 | length 2.1
  Top Layer w0.35: R7.2 122.75,63.711 HL1.2
NetHL2_2: HL2.2 R8.2 | length 2.3
  Top Layer w0.4: R8.2 94.522,53.136 HL2.2
NetR4_2: R4.2 R5.1 R6.2 | length 4.7
  Top Layer w0.35: R4.2 62.881,61.595 R6.2 R5.1
NetR12_2: R12.2 R13.1 R14.2 | length 4.7
  Top Layer w0.35: R12.2 62.671,79.756 R14.2 R13.1
NetVD1_2: VD1.2 X11.2 | length 15.2
  Top Layer w0.35: VD1.2 82.169,96.012 82.804,96.647 91.948,96.647 92.686,95.909 X11.2
RX0: DD2.36 X11.4 | length 19.8
  Top Layer w0.35: X11.4 90.686,93.337 92.202,91.821 96.647,91.821 100.227,88.241 DD2.36
RX1: DD2.5 X10.3 | length 36.2
  Top Layer w0.35: X10.3 100.227,32.577 DD2.5
SCL: DD1.4 DD2.8 R15.1 | length 9.5
  Top Layer w0.35: DD2.8 104.037,56.809 R15.1 104.902,56.769 105.197,56.474 DD1.4
SDA: DD1.3 DD2.9 R16.1 | length 12.8
  Top Layer w0.35: R16.1 103.997,54.785 104.372,55.16 104.547,55.16 105.211,55.824 DD1.3 106.751,55.824 107.061,56.134 107.061,57.531 106.68,57.912 105.791,57.912 105.307,58.396 DD2.9
TX0: DD2.37 X11.3 | length 20
  Top Layer w0.35: X11.3 91.686,93.48 92.17,92.996 96.996,92.996 v1(100.076,89.916) ; DD2.37 98.957,87.757 v1(99.018,87.818)
  Bottom Layer w0.35: v1(99.018,87.818) 100.076,88.876 v1(100.076,89.916)
TX1: DD2.4 X10.4 | length 34.9
  Top Layer w0.35: X10.4 94.615,33.741 94.615,39.751 98.957,44.093 DD2.4
VIN: C3.1 C4.1 C7.2 C11.1 C12.1 C15.2 DA1.7 DA2.7 R2.1 R10.1 X9.2 | length 77.8
  Top Layer w0.35: C11.1 52.068,79.578 52.688,80.198 52.688,80.249 DA2.7 ; C4.1 52.195,61.671 52.57,62.046 52.57,62.137 52.775,62.342 DA1.7
  Top Layer w0.4: C15.2 49.249,79.599 49.749,79.099 R10.1
  Top Layer w0.5: C7.2 49.403,61.798 49.403,59.881 R2.1 ; C4.1@51.943,61.798 C4.1
  Top Layer w0.8: C12.1 46.685,79.883 46.876,79.883 C15.2@48.941,79.883 ; C11.1 51.933,79.589 49.236,79.589 C15.2 ; C15.2@48.941,79.883 C15.2 ; C15.2@48.941,79.883 C15.2
  Top Layer w1: C3.1 49.403,61.798 C4.1@51.943,61.798
  Top Layer w1.2: X9.2 33.909,69.723 ; C12.1 44.145,79.959 33.909,69.723 ; C3.1 41.834,61.798 33.909,69.723
pads on no net: "TTL to RS422.MH9" DA3.4 DD2.12 DD2.13 DD2.14 DD2.16 DD2.17 DD2.18 DD2.19 DD2.20 DD2.21 DD2.22 DD2.23 DD2.24 DD2.25 DD2.26 DD2.28 DD2.29 DD2.30 DD2.33 DD2.34 DD2.35 DD2.41 X10.6 X11.MP1 X11.MP2

## Polygon pours and split planes (outlines as drawn)
GND on Top Layer "NONET_L-01_P-001" (solid, remove dead copper, pour order 0): 0.006,100.006 140.006,100.006 140.006,0.006 140,0 0,0
GND on Bottom Layer "NONET_L-01_P-001" (solid, pour order 1): 0.006,100.006 140.006,100.006 140.006,0.006 0.006,0.006

## Other copper
Top Layer:
  pour cut-out: 87.63,81.534 96.52,81.534 96.52,63.5 87.63,63.5
Bottom Layer:
  pour cut-out: 87.63,81.661 96.52,81.661 96.52,63.627 87.63,63.627

## Silkscreen, mask and mechanical layers (free items; w line width, h text height)
Mechanical 2:
  circle w0.013: c133.506,93.506 r2.65
  circle w0.013: c133.506,6.506 r2.65
  circle w0.013: c6.506,6.506 r2.65
  circle w0.013: c6.506,93.506 r2.65
  lines w0.013: 0.006,0.006 140.006,0.006 140.006,100.006 0.006,100.006 0.006,0.006